# Altium PCB MicArrayPCBBoard_V3.PcbDoc (part 2 of 2)
Units mm, origin at the board's own origin, x right, y up, seen from the top; angles counter-clockwise.
Board outline 272 x 42 mm, 4 copper layers (Top Layer (ANLG1), Mid-Layer1 (GND), Mid-Layer2 (DIG), Bottom Layer (ANLG2)); 140 components, 65 nets, 451 pads, 100 vias.
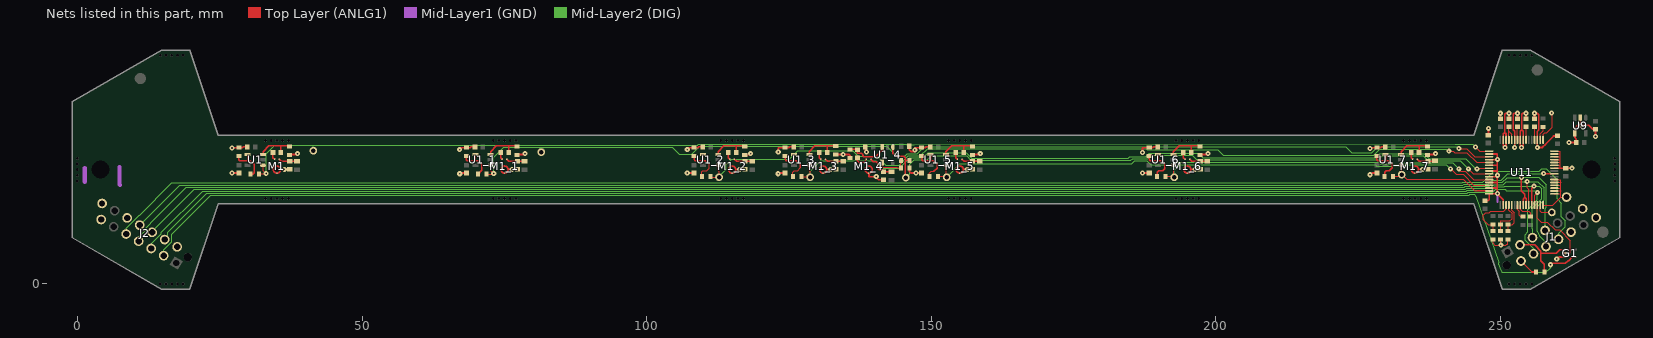
[diagram p4: the nets of this part, all layers, seen from the top]

## Via types
v1: diameter 0.9, hole 0.3, Top Layer (ANLG1) to Bottom Layer (ANLG2), tented both sides, 100 vias

## Nets (pads, with @x,y where several pads share a name; then routed paths per layer and width w, separated by ;. In a path a pad name is that pad's centre, name@x,y a point inside that pad or via, vN(x,y) a via of type N, cw(c..) or ccw(c..) an arc to the next point about the centre after c; other vN are vias at no path point) (continued)
AGND: C2.1 C2_1.1 C2_2.1 C2_3.1 C2_4.1 C2_5.1 C2_6.1 C2_7.1 C20.1 C21.1 C22.2 C22_1.2 C22_2.2 C22_3.2 C22_4.2 C22_5.2 C22_6.2 C22_7.2 C23.1 C23_1.1 C23_2.1 C23_3.1 C23_4.1 C23_5.1 C23_6.1 C23_7.1 CAVCC1.1 CAVCC2.1 CAVCC3.1 CAVCC4.1 CREF.1 CREFCAP.1 CREG1.1 CREG2.1 CVDRIVE.2 G1.3 J1.2 J1.10 J1.13 J1.14 J2.2 J2.10 J2.13 J2.14 M1.2 M1_1.2 M1_2.2 M1_3.2 M1_4.2 M1_5.2 M1_6.2 M1_7.2 R1.1 R1_1.1 R1_2.1 R1_3.1 R1_4.1 R1_5.1 R1_6.1 R1_7.1 R_BUSYPULL.1 RF1.1 RF1_1.1 RF1_2.1 RF1_3.1 RF1_4.1 RF1_5.1 RF1_6.1 RF1_7.1 ROS1.2 ROS2.2 ROS3.2 TP10.1 U9.2 U9.4 U11.2 U11.16 U11.17 U11.18 U11.19 U11.20 U11.21 U11.22 U11.26 U11.27 U11.28 U11.29 U11.30 U11.31 U11.32 U11.33 U11.35 U11.40 U11.41 U11.43 U11.46 U11.47 U11.50 U11.52 U11.54 U11.56 U11.58 U11.60 U11.62 U11.64 | length 191.4
  Top Layer (ANLG1) w0.2: RF1_2.1@117.2,22.65 118.1,22.65 v1(118.25,22.8) ; ROS1.2@248.725,7.75 248.725,7.05 249.05,6.725 v1(250.075,6.725) ; ROS2.2@250.025,7.75 250.075,7.7 v1(250.075,6.725) ; ROS3.2@251.325,7.75 251.325,6.975 251.261,6.911 251.146,6.911 250.96,6.725 v1(250.075,6.725) ; U11.16@257.5,13.775 259.225,13.775 260.625,15.175 ; U11.33@257.5,25.225 257.5,26.2 257.8,26.5 258.15,26.5 259,27.35 v1(259,29.95) ; U11.17@259.475,15.75 260.625,15.75 ; U11.18@259.475,16.25 260.6,16.25 260.625,16.225 ; U11.19@259.475,16.75 260.625,16.75 ; U11.20@259.475,17.25 260.6,17.25 260.625,17.225 ; U11.21@259.475,17.75 260.6,17.75 260.625,17.725 ; U11.22@259.475,18.25 260.625,18.25 260.625,17.725 ; U11.27@259.475,20.75 260.475,20.75 ; U11.28@259.475,21.25 260.45,21.25 260.475,21.275 ; U11.29@259.475,21.75 260.475,21.75 ; U11.30@259.475,22.25 260.475,22.25 ; U11.31@259.475,22.75 260.475,22.75 ; U11.32@259.475,23.25 260.475,23.25 260.475,22.75 ; 260.5,20.25 260.475,20.275 260.475,20.75 ; TP10.1@261.629,15.175 260.625,15.175 ; TP10.1@261.76,15.587 TP10.1@261.875,15.55 ; 260.475,20.75 260.475,21.275 ; 260.475,21.275 260.475,21.75 ; 260.475,21.75 260.475,22.25 ; 260.475,22.25 260.475,22.75 ; 260.625,15.175 260.625,15.75 ; 260.625,15.75 260.625,16.225 ; 260.625,16.225 260.625,16.75 ; 260.625,16.75 260.625,17.225 ; 260.625,17.225 260.625,17.725
  Top Layer (ANLG1) w0.25: 131.625,20 v1@132.25,20 ; 250.8,26.4 250.75,26.45 250.75,29.75 250.9,29.9 v1(251.5,29.9) ; U11.43@252.5,25.225 252.5,26.726 252.25,26.976 252.25,29.75 252.4,29.9 v1(253,29.9) ; U11.41@253.5,25.225 253.5,26.726 253.75,26.976 ; U11.40@254,25.225 254,26.726 253.75,26.976 ; v1(254.5,29.9) 253.9,29.9 253.75,29.75 253.75,26.976 ; v1(256,29.9) 256.5,29.9 256.75,29.65 256.75,26.976 256.65,26.876 256.65,26.85 256.5,26.7 U11.35@256.5,25.225
  Top Layer (ANLG1) w0.3: v1(27.1,19.4) C22.2@28.3,19.4 ; v1(27.1,23.8) 27.15,23.85 R1.1@28.3,23.85 28.95,23.85 29.1,24 C23.1@29.8,24 ; 35.625,20 35.675,20.05 v1(36.3,20.05) C2.1@37.25,20.05 ; RF1.1@37.2,22.65 38.45,22.65 v1(38.6,22.8) ; v1@67.1,19.4 C22_1.2@68.3,19.4 ; v1@67.1,23.7 67.1,23.8 67.15,23.85 R1_1.1@68.3,23.85 68.95,23.85 69.1,24 C23_1.1@69.8,24 ; 75.625,20 75.675,20.05 v1(76.3,20.05) C2_1.1@77.25,20.05 ; RF1_1.1@77.2,22.65 78.45,22.65 v1(78.6,22.8) ; v1(107.1,19.4) C22_2.2@108.3,19.4 ; v1@107.1,23.8 107.15,23.85 R1_2.1@108.3,23.85 108.95,23.85 109.1,24 C23_2.1@109.8,24 ; 115.625,20 v1(116.3,20.05) C2_2.1@117.25,20.05 ; v1@123.1,19.4 C22_3.2@124.3,19.4 ; v1(123.1,23.1) 123.1,23.8 123.15,23.85 R1_3.1@124.3,23.85 124.95,23.85 125.1,24 C23_3.1@125.8,24 ; v1(132.3,20.05) C2_3.1@133.25,20.05 ; RF1_3.1@133.2,22.65 v1(134.5,22.65) 135.55,22.65 135.7,22.5 RF1_4.1@135.7,22.045 ; C22_4.2@138.4,24 138.4,23.3 v1(138.6,23.1) ; M1_4.2@139,19.375 M1_4.2@139,19.37 139.025,19.345 139.025,18.753 140.225,18.746 140.302,18.823 v1@140.325,18.845 ; v1@140.398,18.845 140.4,18.845 140.4,18.495 140.7,18.195 C2_4.1@141.6,18.195 ; C23_4.1@146.1,24.1 146.1,23.475 146.38,23.195 147.1,23.195 147.107,23.203 v1(147.107,23.451) 147.107,23.787 v1@147.1,23.795 ; R1_4.1@146.15,20.3 146.15,19.675 146.43,19.395 v1(147.3,19.395) C22_5.2@148.3,19.395 ; v1@147.1,19.4 C22_5.2@148.3,19.4 ; R1_5.1@148.3,23.845 147.15,23.845 v1@147.1,23.795 ; C23_5.1@149.8,24 149.1,24 148.95,23.85 R1_5.1@148.3,23.85 147.15,23.85 147.1,23.8 v1@147.1,23.795 ; 155.625,20 155.675,20.05 v1(156.3,20.05) C2_5.1@157.25,20.05 ; RF1_5.1@157.2,22.65 158.45,22.65 v1(158.6,22.8) ; v1(187.1,19.4) C22_6.2@188.3,19.4 ; v1(187.1,23) 187.1,23.8 187.15,23.85 R1_6.1@188.3,23.85 188.95,23.85 189.1,24 C23_6.1@189.8,24 ; 195.675,20.05 v1(196.3,20.05) C2_6.1@197.25,20.05 ; RF1_6.1@197.2,22.65 198.45,22.65 v1(198.6,22.8) ; v1(227.1,19.1) 227.4,19.4 C22_7.2@228.3,19.4 ; v1(227.1,23.7) 227.1,23.8 227.15,23.85 R1_7.1@228.3,23.85 228.95,23.85 229.1,24 C23_7.1@229.8,24 ; 235.625,20 235.675,20.05 v1(236.3,20.05) C2_7.1@237.25,20.05 ; RF1_7.1@237.2,22.65 238.45,22.65 v1(238.6,22.8) ; CAVCC4.1@247.325,14.525 247.825,14.525 248.025,14.725 U11.64@248.025,15.75 v1@249.45,15.75 ; CAVCC2.1@247.875,26.075 247.9,26.1 v1(247.9,27.25) ; U11.62@248.025,16.75 249.45,16.75 ; U11.60@248.025,17.75 249.45,17.75 ; U11.58@248.025,18.75 v1@249.45,18.75 ; U11.56@248.025,19.75 249.45,19.75 ; U11.54@248.025,20.75 249.45,20.75 ; U11.52@248.025,21.75 v1@249.45,21.75 ; U11.50@248.025,22.75 249.45,22.75 v1@249.45,21.75 ; v1(249.5,19) 249.5,18.8 v1@249.45,18.75 ; v1(249.5,15.8) v1@249.45,15.75 ; v1(249.5,21.8) v1@249.45,21.75 ; CAVCC1.1@250,28.9 v1(250,29.9) ; U11.2@250.5,13.775 250.5,14.7 v1@249.45,15.75 ; CREFCAP.1@251.5,28.9 v1(251.5,29.9) ; v1(252.5,23.9) U11.43@252.5,25.225 ; CREF.1@253,28.9 v1(253,29.9) ; U11.41@253.5,25.225 253.5,24.1 v1(253.7,23.9) 254,24.2 U11.40@254,25.225 ; J1.2@253.62,3.935 255.555,2 R_BUSYPULL.1@256.25,2 ; CREG2.1@254.5,28.9 v1(254.5,29.9) ; CREG1.1@256,28.9 v1(256,29.9) ; U11.35@256.5,25.225 v1(256.5,23.9) 257.386,23.9 257.95,24.464 257.95,24.5 259.35,25.9 CAVCC3.1@260.1,25.9 ; U11.26@259.475,20.25 260.5,20.25 v1(262.6,20.25) ; v1(259.9,4.3) 260.25,4.65 G1.3@261.35,4.65 ; v1(262.05,24.75) C21.1@263.35,24.75 263.35,25.35 263.1,25.6 U9.4@263.1,26.4 263.1,27.3 263.575,27.775 v1(264.1,27.775) ; U9.2@264.05,29.1 264.05,27.825 v1(264.1,27.775) ; v1(266.7,25.8) C20.1@266.7,27.1 266.2,27.1 265.525,27.775 v1(264.1,27.775) ; v1@249.45,15.75 249.45,16.75 ; 249.45,16.75 249.45,17.75 ; 249.45,17.75 v1@249.45,18.75 ; v1@249.45,18.75 249.45,20.75 ; 249.45,20.75 v1@249.45,21.75 ; v1@250.5,24.2 U11.47@250.5,25.225 250.5,26.3 250.6,26.4 250.8,26.4 251,26.4 U11.46@251,25.225 251,24.1 v1(250.8,23.9) v1@250.5,24.2
  Mid-Layer1 (GND) w0.3: 249.5,14.3 v1(249.5,15.8)
  Mid-Layer1 (GND) w0.75: 1.225,17.85 1.225,20.275 ; 7.325,20.475 7.325,17.375 7.4,17.3
  other v1: 140.325,18.8 67.125,19.275 123.075,19.275 67.1,23.5 107.1,23.5
BUSY: G1.2 U11.14 | length 12.9
  Top Layer (ANLG1) w0.2: U11.14@256.5,13.775 256.5,11.45 257.2,10.75 258.25,10.75 259.6,9.4 260.4,9.4 262.3,7.5 262.3,5.4 262.2,5.3 G1.2@261.35,5.3
BUSY_EXT: G1.1 J1.3 R_BUSYPULL.2 | length 12.6
  Top Layer (ANLG1) w0.25: J1.3@253.45,6.77 256.005,6.77 257.1,5.675 257.1,5.3 ; R_BUSYPULL.2@257.75,2 257.75,3.35 257.1,4 257.1,5.3 ; G1.1@261.35,5.95 260.45,5.95 259.8,5.3 257.1,5.3
BUSY_OR: G1.4 J2.3 | length 265.2
  Top Layer (ANLG1) w0.25: v1(258.815,3.285) 259.06,3.53 261.43,3.53 261.9,4 262,4 262.65,4.65 G1.4@263.25,4.65
  Mid-Layer2 (DIG) w0.2: J2.3@15.1,4.87 15.1,5.9 16.5,7.3 16.5,8.675 23.325,15.5 244.507,15.5 244.636,15.629 245.364,15.629 245.643,15.35 249.681,3.705 249.7,3.65 249.681,3.294 249.888,2.793 250.248,1.925 257.99,1.925 258.815,2.75 v1(258.815,3.285)
CONVST: J1.7 J2.7 U11.9 U11.10 | length 268.3
  Top Layer (ANLG1) w0.25: v1(253.699,18.6) 253.699,16.301 254.3,15.7 254.3,15.1 ; U11.9@254,13.775 254,14.8 254.3,15.1 ; U11.10@254.5,13.775 254.5,14.9 254.3,15.1
  Mid-Layer2 (DIG) w0.2: J2.7@10.701,7.41 10.701,8.16 12,9.46 12,9.75 12.8,10.55 12.8,10.675 19.025,16.9 243.644,16.9 243.844,17.1 248.042,17.1 248.692,17.75 250.316,17.75 251.166,18.6 253.499,18.6 253.699,18.399 v1(253.699,18.6) 253.75,18.65 256.75,18.65 258.1,17.3 258.1,13.4 257.849,13.149 J1.7@257.849,9.31
FRSTD: TP9.1 U11.15 | length 3.2
  Top Layer (ANLG1) w0.2: U11.15@257,13.775 257,12.65 257.175,12.475 TP9.1@259.05,12.475
MIC0: R2.2 TP1.1 U1.1 U11.49 | length 223.3
  Top Layer (ANLG1) w0.2: R2.2@31.95,19.3 v1(33.1,19.3) 32.575,19.825 32.575,20.725 U1.1@32.55,20.75 ; v1(245.625,23.975) 246.35,23.25 U11.49@248.025,23.25
  Mid-Layer2 (DIG) w0.2: v1(33.1,19.3) 33.1,22.8 34.575,24.275 44.125,24.278 104.9,24.3 108.907,24.3 109.057,24.45 145.605,24.45 145.655,24.4 147,24.4 242.075,24.424 245.176,24.424 v1(245.625,23.975) ; TP1.1@41.4,23.325 41.4,24.228
MIC1: R2_1.2 TP2.1 U1_1.1 U11.51 | length 186.5
  Top Layer (ANLG1) w0.2: R2_1.2@71.85,19.2 73,19.2 v1(73.1,19.3) 72.575,19.825 72.575,20.725 U1_1.1@72.55,20.75 ; v1(242.7,23.7) 244.075,23.7 245.525,22.25 U11.51@248.025,22.25
  Mid-Layer2 (DIG) w0.2: v1(73.1,19.3) 73.1,22.2 74.828,23.928 81.45,23.928 ; TP2.1@81.45,23.075 81.45,23.928 ; v1(242.7,23.7) 242.4,24 228.425,24 227.4,22.975 223.9,22.975 222.825,24.05 150.075,24.05 148.805,24.05 147.8,23.045 147.8,23.01 147.54,22.75 145.725,22.75 145.35,22.375 143.925,22.375 142.2,24.1 109.3,24.1 107.9,22.7 105.7,22.7 104.472,23.928 81.45,23.928
MIC2: R2_2.2 TP3.1 U1_2.1 U11.53 | length 145.7
  Top Layer (ANLG1) w0.2: R2_2.2@111.154,18.796 111.284,18.666 TP3.1@112.691,18.666 112.691,19.709 112.575,19.825 112.575,20.725 U1_2.1@112.55,20.75 ; v1(240.95,23.25) 241.725,23.25 242,22.975 244.125,22.975 245.85,21.25 247.18,21.25 U11.53@248.025,21.25
  Mid-Layer2 (DIG) w0.2: TP3.1@112.691,18.666 112.691,18.816 113.95,20.075 113.95,20.825 114.925,21.8 125,21.8 126.55,23.35 136.15,23.35 137.175,22.325 140.475,22.325 142.025,20.775 144.325,20.775 145.95,22.4 148.025,22.4 149.325,23.7 187.725,23.7 187.9,23.525 200.3,23.525 201.275,22.55 227.7,22.55 227.75,22.55 228.8,23.6 240.6,23.6 v1(240.95,23.25)
MIC3: R2_3.2 TP4.1 U1_3.1 U11.55 | length 129.6
  Top Layer (ANLG1) w0.2: R2_3.2@127.125,18.75 128.175,18.75 128.625,19.2 TP4.1@128.691,19.2 ; U1_3.1@128.55,20.75 128.575,20.725 128.575,19.825 128.691,19.709 TP4.1@128.691,19.2 ; TP4.1@128.691,18.666 TP4.1@128.691,19.2 ; TP4.1@129,19.2 TP4.1@128.691,19.2 ; v1(245.9,20.125) 246.025,20.25 U11.55@248.025,20.25
  Mid-Layer2 (DIG) w0.2: TP4.1@128.691,18.666 128.691,19.716 130.525,21.55 140.25,21.55 141.575,20.225 144.4,20.225 146.225,22.05 148.5,22.05 149.45,23 156.1,23 157.1,22 184.6,22 184.875,22.275 187.675,22.275 188.25,22.85 196.975,22.85 197.725,22.1 228.075,22.1 228.775,22.8 236.595,22.8 237.34,22.055 237.34,22.045 237.485,21.9 243.925,21.9 245.7,20.125 v1(245.9,20.125)
MIC4: R2_4.2 TP5.1 U1_4.1 U11.57 | length 115.2
  Top Layer (ANLG1) w0.2: v1(244.375,20.125) 245.25,19.25 U11.57@248.025,19.25
  Top Layer (ANLG1) w0.25: U1_4.1@143.25,23.95 143.25,22.85 143.75,22.35 145.175,22.35 145.45,22.075 145.45,21.625 ; TP5.1@145.475,18.95 145.45,18.975 145.45,21.625 ; R2_4.2@146.15,21.6 146.125,21.625 145.45,21.625
  Mid-Layer2 (DIG) w0.2: TP5.1@145.525,18.6 146.175,19.25 146.175,20.9 146.975,21.7 147.64,21.7 149.3,21.7 150.025,22.425 156.18,22.425 156.955,21.65 185.075,21.65 185.35,21.925 188.125,21.925 188.7,22.5 195.805,22.5 196.605,21.7 228.565,21.7 228.722,21.857 228.722,21.872 229.275,22.425 236.475,22.425 236.99,21.91 236.99,21.9 237.34,21.55 242.95,21.55 v1(244.375,20.125)
MIC5: R2_5.2 TP6.1 U1_5.1 U11.59 | length 102.1
  Top Layer (ANLG1) w0.2: R2_5.2@151.154,18.796 TP6.1@152.575,18.796 ; U1_5.1@152.55,20.75 152.575,20.725 TP6.1@152.575,18.796 ; TP6.1@152.575,18.775 TP6.1@152.575,18.796 ; TP6.1@152.65,18.796 TP6.1@152.575,18.796 ; v1@242.7,20.25 v1(242.7,20.125) 242.7,20.025 243.025,19.7 243.8,19.7 245.275,18.225 248,18.225 U11.59@248.025,18.25
  Mid-Layer2 (DIG) w0.2: TP6.1@152.625,18.825 152.85,18.825 155.025,21 185.2,21 185.725,21.525 187.875,21.525 188.55,20.85 192.15,20.85 192.575,21.275 196.535,21.275 228.6,21.275 228.9,20.975 232.775,20.975 233,21.2 241.625,21.2 v1(242.7,20.125)
MIC6: R2_6.2 TP7.1 U1_6.1 U11.61 | length 62.1
  Top Layer (ANLG1) w0.2: R2_6.2@191.154,18.796 192.561,18.796 192.575,18.781 192.575,20.725 U1_6.1@192.55,20.75 ; v1@241.175,20.25 242.275,19.15 243.45,19.15 245.35,17.25 U11.61@248.025,17.25
  Mid-Layer2 (DIG) w0.2: TP7.1@192.691,18.666 192.691,19.891 193.65,20.85 196.465,20.85 226.125,20.85 228.075,20.85 228.3,20.625 232.925,20.625 233.15,20.85 237.05,20.85 240.5,20.85 v1(241.225,20.125)
MIC7: R2_7.2 TP8.1 U1_7.1 U11.63 | length 19.9
  Top Layer (ANLG1) w0.2: R2_7.2@231.154,18.796 232.361,18.796 TP8.1@232.691,19.125 ; U1_7.1@232.55,20.75 232.691,20.609 TP8.1@232.691,19.125 ; 245.95,16.25 245.5,16.25 243.475,18.275 233.5,18.275 232.691,19.084 TP8.1@232.691,19.125
  Top Layer (ANLG1) w0.25: 245.95,16.25 U11.63@248.025,16.25
NetC2_1_2: C2_1.2 FB1_1.1 M1_1.3 | length 3.3
  Top Layer (ANLG1) w0.25: M1_1.3@75.385,21.84 75.775,21.45 C2_1.2@77.25,21.45 77.3,21.5 FB1_1.1@78.5,21.5
NetC2_2: C2.2 FB1.1 M1.3 | length 3.3
  Top Layer (ANLG1) w0.25: M1.3@35.385,21.84 35.775,21.45 C2.2@37.25,21.45 37.3,21.5 FB1.1@38.5,21.5
NetC2_2_2: C2_2.2 FB1_2.1 M1_2.3 | length 3.3
  Top Layer (ANLG1) w0.25: M1_2.3@115.385,21.84 115.775,21.45 C2_2.2@117.25,21.45 117.3,21.5 FB1_2.1@118.5,21.5
NetC2_3_2: C2_3.2 FB1_3.1 M1_3.3 | length 3.3
  Top Layer (ANLG1) w0.25: M1_3.3@131.385,21.84 131.775,21.45 C2_3.2@133.25,21.45 133.3,21.5 FB1_3.1@134.5,21.5
NetC2_4_2: C2_4.2 FB1_4.1 M1_4.3 | length 4.9
  Top Layer (ANLG1) w0.25: M1_4.3@139.385,21.84 139.83,21.395 140.3,21.395 140.6,21.095 140.6,20.195 140.9,19.895 C2_4.2@141.6,19.895 ; C2_4.2@141.6,19.595 FB1_4.1@143,19.595
NetC2_5_2: C2_5.2 FB1_5.1 M1_5.3 | length 3.3
  Top Layer (ANLG1) w0.25: M1_5.3@155.385,21.84 155.775,21.45 C2_5.2@157.25,21.45 157.3,21.5 FB1_5.1@158.5,21.5
NetC2_6_2: C2_6.2 FB1_6.1 M1_6.3 | length 3.3
  Top Layer (ANLG1) w0.25: M1_6.3@195.385,21.84 195.775,21.45 C2_6.2@197.25,21.45 197.3,21.5 FB1_6.1@198.5,21.5
NetC2_7_2: C2_7.2 FB1_7.1 M1_7.3 | length 3.3
  Top Layer (ANLG1) w0.25: M1_7.3@235.385,21.84 235.775,21.45 C2_7.2@237.25,21.45 237.3,21.5 FB1_7.1@238.5,21.5
NetC3_1: C3.1 M1.1 | length 1.3
  Top Layer (ANLG1) w0.25: C3.1@34.3,23 34.3,22.125 M1.1@34.585,21.84
NetC3_1_1: C3_1.1 M1_1.1 | length 1.3
  Top Layer (ANLG1) w0.25: C3_1.1@74.3,23 74.3,22.125 M1_1.1@74.585,21.84
NetC3_1_2: C3_1.2 RF1_1.2 U1_1.3 | length 6.7
  Top Layer (ANLG1) w0.25: U1_1.3@72.55,22.65 72.55,23.15 73.55,24.15 75.7,24.15 ; C3_1.2@75.7,23 75.7,23.7 75.7,24.15 ; RF1_1.2@77.2,24.15 75.7,24.15
NetC3_2: C3.2 RF1.2 U1.3 | length 6.7
  Top Layer (ANLG1) w0.25: U1.3@32.55,22.65 32.55,23.15 33.55,24.15 35.7,24.15 ; C3.2@35.7,23 35.7,23.7 35.7,24.15 ; RF1.2@37.2,24.15 35.7,24.15
NetC3_2_1: C3_2.1 M1_2.1 | length 1.3
  Top Layer (ANLG1) w0.25: C3_2.1@114.3,23 114.3,22.125 M1_2.1@114.585,21.84
NetC3_2_2: C3_2.2 RF1_2.2 U1_2.3 | length 6.7
  Top Layer (ANLG1) w0.25: U1_2.3@112.55,22.65 112.55,23.15 113.55,24.15 115.7,24.15 ; C3_2.2@115.7,23 115.7,24.15 ; RF1_2.2@117.2,24.15 115.7,24.15
NetC3_3_1: C3_3.1 M1_3.1 | length 1.3
  Top Layer (ANLG1) w0.25: C3_3.1@130.3,23 130.3,22.125 M1_3.1@130.585,21.84
NetC3_3_2: C3_3.2 RF1_3.2 U1_3.3 | length 6.7
  Top Layer (ANLG1) w0.25: U1_3.3@128.55,22.65 128.55,23.15 129.55,24.15 131.7,24.15 ; C3_3.2@131.7,23 131.7,23.7 131.7,24.15 ; RF1_3.2@133.2,24.15 131.7,24.15
NetC3_4_1: C3_4.1 M1_4.1 | length 2.6
  Top Layer (ANLG1) w0.2: 138.4,21.3 M1_4.1@138.585,21.84
  Top Layer (ANLG1) w0.25: C3_4.1@137,22.1 137,21.6 137.3,21.3 138.4,21.3
NetC3_4_2: C3_4.2 RF1_4.2 U1_4.3 | length 7.8
  Top Layer (ANLG1) w0.25: RF1_4.2@135.7,23.545 136.945,23.545 137,23.6 C3_4.2@137.1,23.5 ; C3_4.2@137,23.5 137,23 137.1,22.9 137.7,22.9 137.9,22.7 137.9,22.5 138.1,22.3 140.2,22.3 141.4,23.5 141.4,23.995 U1_4.3@141.35,24.045
NetC3_5_1: C3_5.1 M1_5.1 | length 1.3
  Top Layer (ANLG1) w0.25: C3_5.1@154.3,23 154.3,22.125 M1_5.1@154.585,21.84
NetC3_5_2: C3_5.2 RF1_5.2 U1_5.3 | length 6.7
  Top Layer (ANLG1) w0.25: U1_5.3@152.55,22.65 152.55,23.15 153.55,24.15 155.7,24.15 ; C3_5.2@155.7,23 155.7,23.7 155.7,24.15 ; RF1_5.2@157.2,24.15 155.7,24.15
NetC3_6_1: C3_6.1 M1_6.1 | length 1.3
  Top Layer (ANLG1) w0.25: C3_6.1@194.3,23 194.3,22.125 M1_6.1@194.585,21.84
NetC3_6_2: C3_6.2 RF1_6.2 U1_6.3 | length 6.7
  Top Layer (ANLG1) w0.25: U1_6.3@192.55,22.65 192.55,23.15 193.55,24.15 195.7,24.15 ; C3_6.2@195.7,23 195.7,23.7 195.7,24.15 ; RF1_6.2@197.2,24.15 195.7,24.15
NetC3_7_1: C3_7.1 M1_7.1 | length 1.3
  Top Layer (ANLG1) w0.25: C3_7.1@234.3,23 234.3,22.125 M1_7.1@234.585,21.84
NetC3_7_2: C3_7.2 RF1_7.2 U1_7.3 | length 6.7
  Top Layer (ANLG1) w0.25: U1_7.3@232.55,22.65 232.55,23.15 233.55,24.15 235.7,24.15 ; C3_7.2@235.7,23 235.7,23.7 235.7,24.15 ; RF1_7.2@237.2,24.15 235.7,24.15
NetCREFCAP_2: CREFCAP.2 U11.44 U11.45 | length 4
  Top Layer (ANLG1) w0.2: U11.45@251.5,25.225 251.5,26.7 ; CREFCAP.2@251.5,27.5 251.5,27 251.5,26.7 ; U11.44@252,25.225 252,26.2 251.5,26.7
NetCREG1_2: CREG1.2 U11.36 | length 2.3
  Top Layer (ANLG1) w0.2: U11.36@256,25.225 CREG1.2@256,27.5
NetCREG2_2: CREG2.2 U11.39 | length 2.3
  Top Layer (ANLG1) w0.2: U11.39@254.5,25.225 CREG2.2@254.5,27.5
NetR1_1_2: R1_1.2 R2_1.1 U1_1.4 | length 6.7
  Top Layer (ANLG1) w0.25: R1_1.2@68.3,22.35 68.3,21.75 68.45,21.6 69.9,21.6 ; U1_1.4@69.85,22.65 69.85,21.65 69.9,21.6 ; R2_1.1@70.35,19.2 71,19.85 71,20.9 70.3,21.6 69.9,21.6
NetR1_2: R1.2 R2.1 U1.4 | length 6.9
  Top Layer (ANLG1) w0.25: R1.2@28.3,22.35 28.3,21.75 28.45,21.6 29.9,21.6 ; U1.4@29.85,22.65 29.85,21.65 29.9,21.6 ; R2.1@30.35,19.2 30.707,19.193 31,19.475 31,20.9 30.3,21.6 29.9,21.6
NetR1_2_2: R1_2.2 R2_2.1 U1_2.4 | length 7.8
  Top Layer (ANLG1) w0.2: R2_2.1@109.654,18.796 109.654,19.654 109.8,19.8 110.55,19.8 111,20.25 111,20.9
  Top Layer (ANLG1) w0.25: R1_2.2@108.3,22.35 108.3,21.75 108.45,21.6 109.9,21.6 ; U1_2.4@109.85,22.65 109.85,21.65 109.9,21.6 ; 111,20.9 110.3,21.6 109.9,21.6
NetR1_3_2: R1_3.2 R2_3.1 U1_3.4 | length 7.7
  Top Layer (ANLG1) w0.2: R2_3.1@125.654,18.796 125.654,19.554 125.925,19.825 126.525,19.825 127,20.3
  Top Layer (ANLG1) w0.25: R1_3.2@124.3,22.35 124.3,21.75 124.45,21.6 125.9,21.6 ; U1_3.4@125.85,22.65 125.85,21.65 125.9,21.6 ; 127,20.3 127,20.9 126.3,21.6 125.9,21.6
NetR1_4_2: R1_4.2 R2_4.1 U1_4.4 | length 5.4
  Top Layer (ANLG1) w0.2: U1_4.4@141.35,21.25 141.35,20.55 141.5,20.4 143.9,20.4 144,20.3 R1_4.2@144.65,20.3 R2_4.1@144.65,21.6
NetR1_5_2: R1_5.2 R2_5.1 U1_5.4 | length 7.7
  Top Layer (ANLG1) w0.2: R2_5.1@149.654,18.796 149.654,19.354 149.975,19.675 150.45,19.675
  Top Layer (ANLG1) w0.25: R1_5.2@148.3,22.35 148.3,21.75 148.45,21.6 149.9,21.6 ; U1_5.4@149.85,22.65 149.85,21.65 149.9,21.6 ; 150.45,19.675 151,20.225 151,20.9 150.3,21.6 149.9,21.6
NetR1_6_2: R1_6.2 R2_6.1 U1_6.4 | length 7.8
  Top Layer (ANLG1) w0.25: R1_6.2@188.3,22.35 188.3,21.75 188.45,21.6 189.9,21.6 ; R2_6.1@189.654,18.796 189.654,19.554 189.925,19.825 190.65,19.825 191,20.175 191,20.9 190.3,21.6 189.9,21.6 ; U1_6.4@189.85,22.65 189.85,21.65 189.9,21.6
NetR1_7_2: R1_7.2 R2_7.1 U1_7.4 | length 7.7
  Top Layer (ANLG1) w0.25: R1_7.2@228.3,22.35 228.3,21.75 228.45,21.6 229.9,21.6 ; R2_7.1@229.654,18.796 229.654,19.504 229.975,19.825 230.475,19.825 231,20.35 231,20.9 230.3,21.6 229.9,21.6 ; U1_7.4@229.85,22.65 229.85,21.65 229.9,21.6
NetR_RANGE_1: R_RANGE.1 U11.8 | length 3.4
  Top Layer (ANLG1) w0.2: U11.8@253.5,13.775 253.5,13.025 253.875,12.65 254.95,12.65 255.3,12.3 R_RANGE.1@255.3,11.8
NetR_REFSEL_2: R_REFSEL.2 U11.34 | length 2.5
  Top Layer (ANLG1) w0.2: U11.34@257,25.225 257,26.3 257.5,26.8 257.5,27.25 R_REFSEL.2@257.3,27.45
NetR_STBY_L_1: R_STBY_L.1 U11.7 | length 2.7
  Top Layer (ANLG1) w0.2: U11.7@253,13.775 253,13 253.275,12.725 253.275,11.975 253.45,11.8 R_STBY_L.1@254,11.8
OS0: ROS1.1 ROS6.2 U11.3 | length 9.1
  Top Layer (ANLG1) w0.2: ROS1.1@248.725,9.25 ROS6.2@248.725,10.35 247.825,10.35 247,11.175 247,11.975 247.45,12.425 248.05,12.425 248.325,12.7 250.616,12.7 251,13.084 U11.3@251,13.775
OS1: ROS2.1 ROS5.2 U11.4 | length 6.6
  Top Layer (ANLG1) w0.2: ROS2.1@250.025,9.25 ROS5.2@250.025,10.35 250.025,11.025 251.679,11.025 252.05,11.396 252.05,12.304 251.5,12.854 U11.4@251.5,13.775
OS2: ROS3.1 ROS4.2 U11.5 | length 5.5
  Top Layer (ANLG1) w0.2: ROS3.1@251.35,9.275 ROS4.2@251.35,10.35 252.1,10.35 252.4,10.65 252.4,12.449 252,12.849 U11.5@252,13.775
REFINOUT: CREF.2 U11.42 | length 2.3
  Top Layer (ANLG1) w0.2: U11.42@253,25.225 CREF.2@253,27.5
RESET: J1.6 J2.6 U11.11 | length 264.6
  Top Layer (ANLG1) w0.2: v1(254.7,17.9) 254.7,16.8 255.025,16.475 255.025,13.8 U11.11@255,13.775
  Mid-Layer2 (DIG) w0.2: J2.6@13.071,8.975 13.6,9.504 13.6,9.7 20.45,16.55 243.859,16.55 244.059,16.75 248.258,16.75 248.858,17.35 250.481,17.35 251.031,17.9 253.41,17.9 253.989,17.9 v1(254.7,17.9) 256.6,17.9 257.7,16.8 257.7,14.7 256.475,13.475 256.475,9.175 256.8,8.35 258.019,7.131 J1.6@258.019,6.475
SPI_CLK: J1.5 J2.5 U11.12 | length 262.7
  Top Layer (ANLG1) w0.25: U11.12@255.5,13.775 255.5,16.7 v1@255.75,16.95 ; v1@255.75,16.95 v1(255.899,17.1) v1@255.75,16.95
  Mid-Layer2 (DIG) w0.2: J2.5@12.901,6.14 12.901,6.937 14.7,8.737 14.7,8.95 21.95,16.2 244.004,16.2 244.204,16.4 248.474,16.4 249.024,16.95 250.647,16.95 250.797,17.1 v1(255.899,17.1) 256.8,17.1 257.3,16.6 257.3,14.9 255.6,13.2 255.6,9.634 255.649,9.585 J1.5@255.649,8.04
SPI_CS_N: J1.4 J2.4 U11.13 | length 260.3
  Top Layer (ANLG1) w0.2: U11.13@256,13.775 256,15.5 256.175,15.675 v1(256.5,16)
  Mid-Layer2 (DIG) w0.2: J2.4@15.27,7.705 15.8,8.234 15.8,9.025 22.625,15.85 244.149,15.85 244.349,16.05 248.689,16.05 249.189,16.55 250.813,16.55 251.038,16.325 255.511,16.325 255.516,16.32 256.18,16.32 v1(256.5,16) 256.5,14.666 254.8,12.966 254.8,9.05 254.325,8.575 254.325,7.575 255.82,6.08 J1.4@255.82,5.205
SPI_MISO1: J2.8 U11.24 | length 252.4
  Top Layer (ANLG1) w0.25: v1(257.6,19.3) 259.425,19.3 U11.24@259.475,19.25
  Mid-Layer2 (DIG) w0.2: J2.8@10.871,10.245 17.876,17.25 243.428,17.25 243.628,17.45 247.827,17.45 248.527,18.15 250.15,18.15 251.3,19.3 v1(257.6,19.3)
SPI_MISO2: J1.8 J2.9 | length 269.2
  Mid-Layer2 (DIG) w0.2: J2.9@8.501,8.68 8.501,9.701 10.8,12 10.85,12 16.5,17.65 26.243,17.65 243.262,17.65 243.412,17.8 246.9,17.8 248.8,19.7 256.85,19.7 257.275,20.125 258.075,20.125 259.95,18.25 259.95,14.85 260.7,14.1 260.7,11.7 261.425,10.975 261.425,10 261.125,9.7 260.219,8.794 J1.8@260.219,7.745
pads on no net: Designator3.0 Designator4.0 Designator5.0 Designator6.0 Designator7.0 Designator8.0 Designator9.0 Designator10.0 Designator11.0 Designator12.0 Designator13.0 Designator14.0 Designator15.0 Designator16.0 Designator17.0 Designator18.0 Designator19.0 Designator20.0 F1.1 F2.1 F3.1 J1.0 J1.9 J2.0 M1. M1_1. M1_2. M1_3. M1_4. M1_5. M1_6. M1_7. T1.0 T2.0 U11.25
copper on no net: | length 84
  Top Layer (ANLG1) w0.2: 14.5,36.7 14.5,38.5 ; 16,36.7 16,38.5 ; 17.5,36.7 17.5,38.5 ; 13,36.7 19,36.7 19,38.5 13,38.5 13,36.7
  Mid-Layer1 (GND) w0.2: 14.5,36.7 14.5,38.5 ; 16,36.7 16,38.5 ; 17.5,36.7 17.5,38.5 ; 13,36.7 19,36.7 19,38.5 13,38.5 13,36.7
  Mid-Layer2 (DIG) w0.2: 14.5,36.7 14.5,38.5 ; 16,36.7 16,38.5 ; 17.5,36.7 17.5,38.5 ; 13,36.7 19,36.7 19,38.5 13,38.5 13,36.7
  Bottom Layer (ANLG2) w0.2: 14.5,36.7 14.5,38.5 ; 16,36.7 16,38.5 ; 17.5,36.7 17.5,38.5 ; 13,36.7 13,38.5 19,38.5 19,36.7 13,36.7

## Polygon pours and split planes (outlines as drawn)
AGND on Mid-Layer1 (GND) "AGnd" (solid, pour order 41): 0,32.5 13,40 20,40 25,25 245,25 250,40 257,40 270,32.5 270,19.2 250.8,19.2 250.8,15 248.8,15 246.8,16 244.8,16.2 242.9,16.2 241.2,19.2 0,19.2
AGND on Mid-Layer1 (GND) "AGnd" (solid, pour order 43): 0,19 241,19 242.8,16 244.8,16 246.8,15.8 248.7,14.8 251,14.8 251,19 270,19 270,7.5 257.009,0 250,0 245,15 25,15 20,0 13,0 0,7.5
5V on Bottom Layer (ANLG2) "5V" (solid, pour order 35): 20.671,9.468 23.177,16.075 24.945,16.075 24.765,15.098 20,0 14.25,0 17.175,5.075 18.025,5.474
AGND on Bottom Layer (ANLG2) "AGnd" (solid, pour order 44): 13,0 0,7.5 0,32.5 13,40 20,40 25,25 245,25 250,40 257.009,40 270,32.5 270,7.5 257.009,0 250,0 245,15 25,15 20,0

## Other copper
Top Layer (ANLG1):
  text "1" at 13.7,37.1 h1
  text "TOP" at 22.2,24.9 h1 r90
  text "EPFL / IC / LAP - LCAV / R.Beuchat / R. Scheibler / F. Rojo" at 15.725,22 h1 r90
Mid-Layer1 (GND):
  text "2" at 14.9,37.1 h1
Mid-Layer2 (DIG):
  text "3" at 16.4,37.1 h1
Bottom Layer (ANLG2):
  text "4" at 18.6,37.1 h1
  text "BOT" at 22.2,27.4 h1 r90

## Silkscreen, mask and mechanical layers (free items; w line width, h text height)
Top Overlay:
  text "FD" at 260.05,12.75 h1
  text "OS" at 253.125,8.175 h1 r90
  text "2" at 252.4,7.15 h1 r180
  text "0" at 249.175,7 h1 r180
  text "1" at 250.5,6.9 h1 r180
Bottom Overlay:
  text "EPFL / IC / LAP - LCAV / R.Beuchat / R. Scheibler / F. Rojo" at 20.325,34.95 h1 r90
  text "Mic0" at 41.85,21.75 h1.2 r90
  text "Mic1" at 82,21.6 h1.2 r90
  text "Mic4" at 144.325,20.775 h1.2 r90
  text "Mic6" at 191.5,20.7 h1.2 r90
  text "Mic3" at 127.475,20.65 h1.2 r90
  text "Mic5" at 151.5,20.65 h1.2 r90
  text "Mic2" at 111.4,20.55 h1.2 r90
  text "Mic7" at 231.45,20.275 h1.2 r90
Mechanical 3:
  lines w2: -1,16.7 -1,6.925 12.75,-1 14.2,-1 ; -1,23.3 -1,33.075 12.75,41 14.2,41 ; 19.8,-1 20.7,-1 ; 19.8,41 20.7,41 ; 20.75,-0.9 25.725,14 31.7,14 ; 20.75,40.9 25.725,26 31.7,26 ; 38.3,14 71.7,14 ; 38.3,26 71.7,26 ; 78.3,14 111.7,14 ; 78.3,26 111.7,26 ; 118.3,14 151.7,14 ; 118.3,26 151.7,26 ; 158.3,14 191.7,14 ; 158.3,26 191.7,26 ; 198.3,14 231.7,14 ; 198.3,26 231.7,26 ; 238.3,14 244.275,14 249.25,-0.9 ; 238.3,26 244.275,26 249.25,40.9 ; 249.3,-1 250.2,-1 ; 249.3,41 250.2,41 ; 255.8,-1 257.25,-1 271,6.925 271,16.7 ; 255.8,41 257.25,41 ; 256.8,41 257.25,41 ; 271,23.3 271,33.075 257.25,41
Mechanical 6:
  pour cut-out: 13,0 0,7.5 0,32.5 13,40 20,40 25,25 245,25 250,40 257.009,40 270,32.5 270,7.5 257.009,0 250,0 245,15 25,15 20,0
  lines w0.01: 257,40 250,40 245,25 25,25 20,40 13,40 0,32.5 0,7.5 13,0 20,0 25,15 245,15 250,0 257.009,0 270,7.5 270,32.5 257.009,40

## Dimensions
131,20 to 115,20 on Mechanical 10
75,20 to 35,20 on Mechanical 10
115,20 to 75,20 on Mechanical 10
155,20 to 139,20.005 on Mechanical 10
235,20 to 195,20 on Mechanical 10
139,20.005 to 131,20 on Mechanical 10
195,20 to 155,20 on Mechanical 10
4,20 to -1,31.923 on Mechanical 16
266,20 to 271,8.077 on Mechanical 16
4,20 to -1,8.077 on Mechanical 16
4,20 to -1,31.923 on Mechanical 16
245.333,14 to 245.333,26 on Mechanical 16
255.277,-1 to 255.277,41 on Mechanical 16
245.333,26 to 255.277,41 on Mechanical 16
255.277,-1 to 245.333,14 on Mechanical 16
271,8.077 to 255.277,-1 on Mechanical 16
271,31.923 to 271,8.077 on Mechanical 16
255.277,41 to 271,31.923 on Mechanical 16
25,15 to 25,25 on Mechanical 10
25,25 to 20,40 on Mechanical 10
20,0 to 25,15 on Mechanical 10
0,7.5 to 13,0 on Mechanical 10
0,32.5 to 0,7.5 on Mechanical 10
25,15 to 20,0 on Mechanical 10
13,0 to 0,7.5 on Mechanical 10
20,0 to 13,0 on Mechanical 10
245,15 to 25,15 on Mechanical 10
250,0 to 245,15 on Mechanical 10
257.009,0 to 250,0 on Mechanical 10
270,7.5 to 257.009,0 on Mechanical 10
270,32.5 to 270,7.5 on Mechanical 10
257.009,40 to 270,32.5 on Mechanical 10
250,40 to 257.009,40 on Mechanical 10
245,25 to 250,40 on Mechanical 10
25,25 to 245,25 on Mechanical 10
20,40 to 25,25 on Mechanical 10
13,40 to 20,40 on Mechanical 10
0,32.5 to 13,40 on Mechanical 10
0,32.5 to 13,40 on Mechanical 10
13,0 to 13,40 on Mechanical 10
0,7.5 to 270,7.5 on Mechanical 10